# Altium PCB IMX_PCB.PcbDoc (part 2 of 2)
Units mm, origin at the board's own origin, x right, y up, seen from the top; angles counter-clockwise.
Board outline 66 x 57 mm, 4 copper layers (L1 (Sensor), L2 (GND), L3 (PWR), L4 (Comp)), stack 1.586 mm thick; 125 components, 55 nets, 466 pads, 337 vias.
Unrouted connection lines stored in the file: 246.
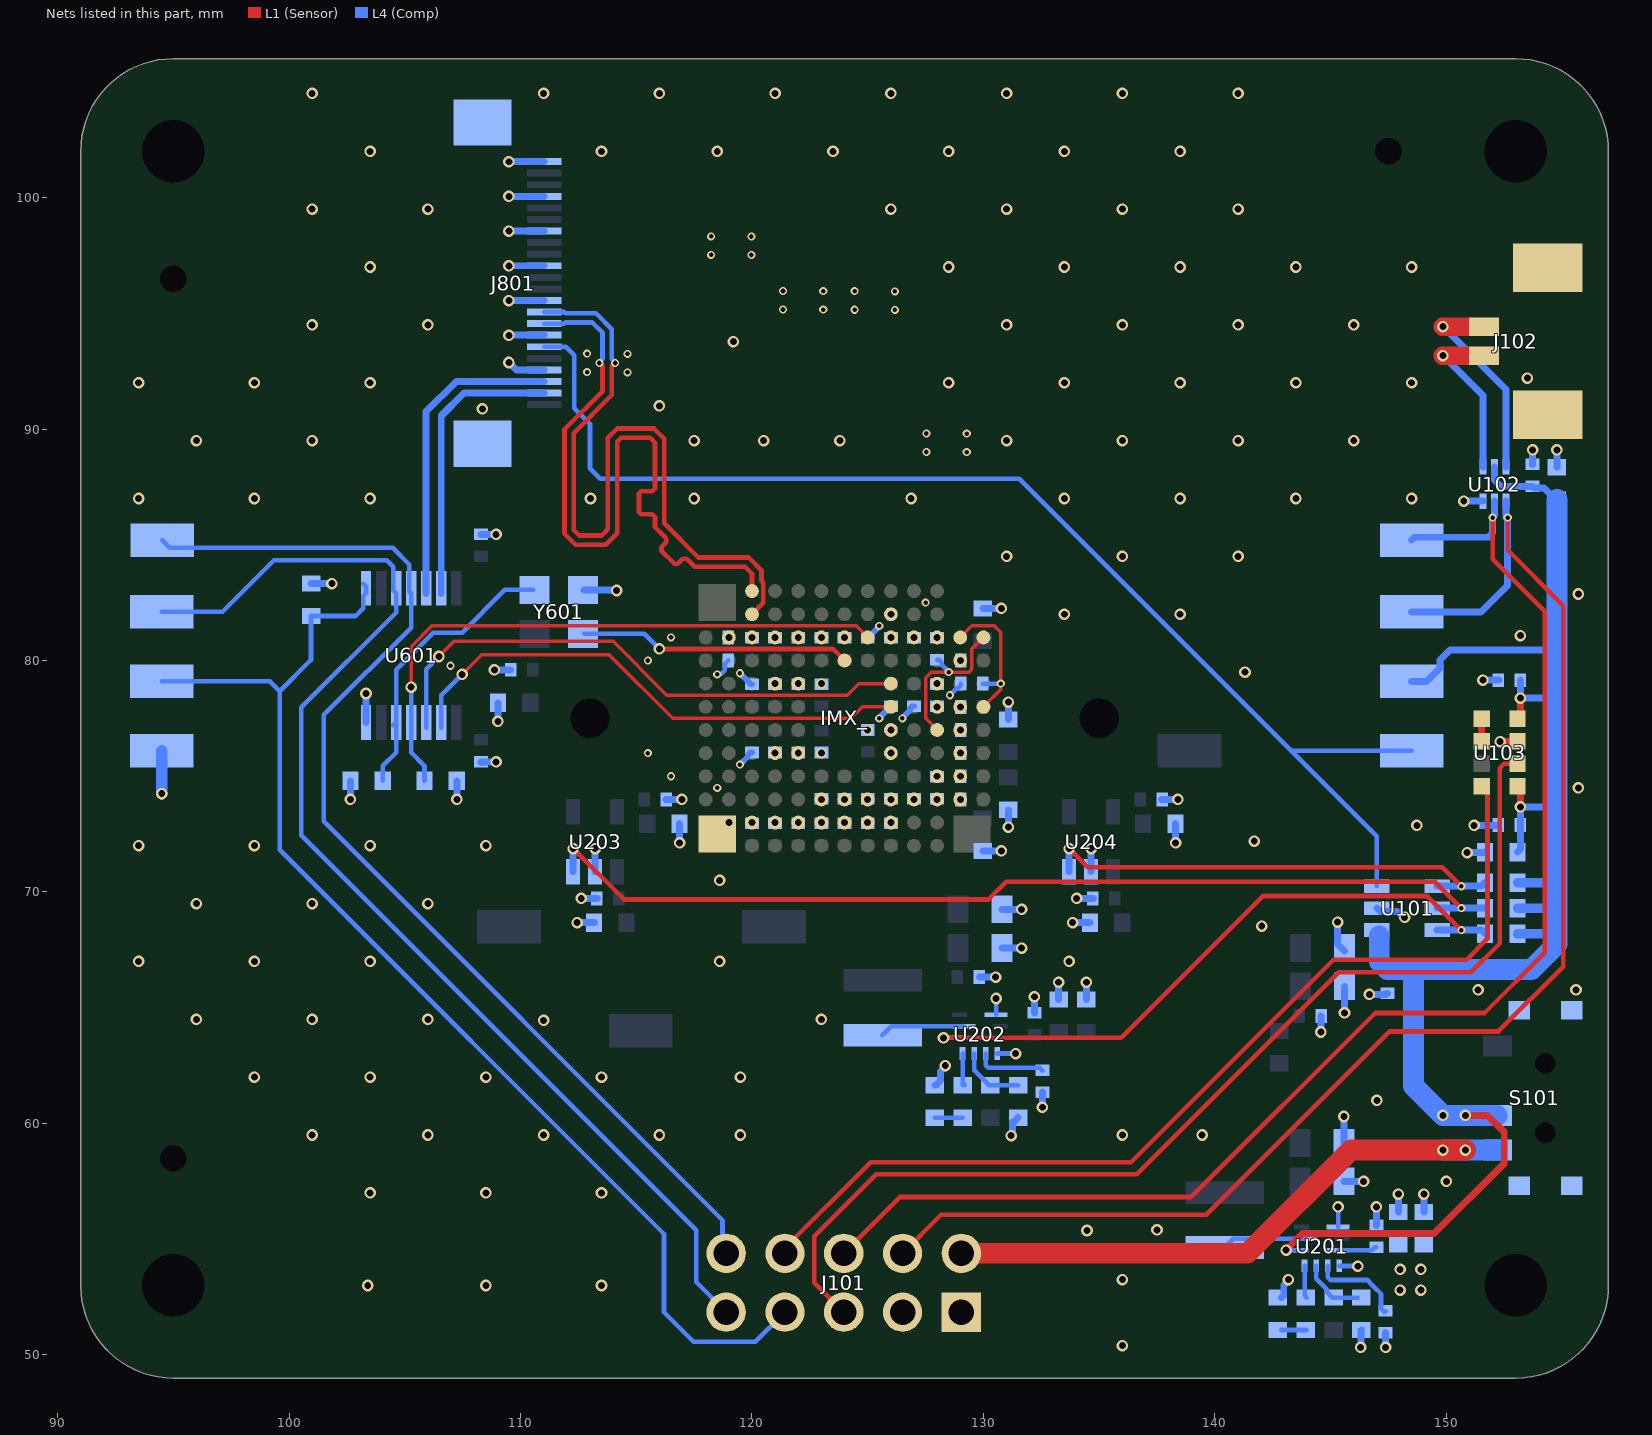
[diagram p4: the nets of this part, all layers, seen from the top]

## Via types
v1: diameter 0.5, hole 0.3, L1 (Sensor) to L4 (Comp), 221 vias
v2: diameter 0.45/0.45/0.45/0.45 (per signal layer), hole 0.3, L1 (Sensor) to L4 (Comp), 63 vias
v3: diameter 0.35, hole 0.2, L1 (Sensor) to L4 (Comp), 51 vias
v4: diameter 0.45, hole 0.3, L1 (Sensor) to L4 (Comp), 2 vias

## Nets (pads, with @x,y where several pads share a name; then routed paths per layer and width w, separated by ;. In a path a pad name is that pad's centre, name@x,y a point inside that pad or via, vN(x,y) a via of type N, cw(c..) or ccw(c..) an arc to the next point about the centre after c; other vN are vias at no path point) (continued)
CSI2_D3_N: IMX_.L2 J801.14 | length 32
  L1 (Sensor) w0.2: v3(114.09,92.853) 113.945,92.708 113.945,91.47 112.3,89.825 112.3,85.641 112.541,85.4 113.509,85.4 113.775,85.666 113.775,89.616 114.184,90.025 115.766,90.025 116.212,89.578 116.212,85.923 117.685,84.45 119.866,84.45 120.41,83.906 120.41,83.44 120.49,83.36 120.49,82.49 IMX_.L2@120,82
  L4 (Comp) w0.2: J801.14@111.027,95.056 111.877,95.056 111.927,95.005 113.26,95.005 113.945,94.32 113.945,93.039 114.085,92.9 v3@114.085,92.847
CSI2_D3_P: IMX_.L1 J801.15 | length 32
  L1 (Sensor) w0.2: v3(113.41,92.855) 113.545,92.72 113.545,91.636 111.9,89.991 111.9,85.475 112.375,85 113.675,85 114.175,85.5 114.175,89.45 114.35,89.625 115.6,89.625 115.812,89.413 115.812,87.8 115.812,87.434 115.695,87.317 115.218,87.317 115.118,87.217 115.118,86.417 115.218,86.317 115.695,86.317 115.812,86.2 115.812,86.1 115.812,85.757 116.208,85.361 116.3,85.269 116.3,85.103 116.089,84.892 116.089,84.75 116.655,84.184 116.796,84.184 117.008,84.396 117.173,84.396 117.244,84.325 117.519,84.05 119.7,84.05 120,83.75 IMX_.L1@120,83
  L4 (Comp) w0.2: J801.15@111.027,94.555 111.877,94.555 111.927,94.605 113.095,94.605 113.545,94.155 113.545,93.031 113.404,92.89 v3@113.404,92.849
CSI2_SCL: J801.20 U601.12 | length 13.5
  L4 (Comp) w0.3: U601.12@105.925,82.9 105.925,86.6 105.925,90.75 107.231,92.056 J801.20@111.027,92.056
CSI2_SDA: J801.21 U601.13 | length 12.5
  L4 (Comp) w0.3: U601.13@106.575,82.9 106.575,86.737 106.575,90.575 107.555,91.555 J801.21@111.027,91.555
FLAG1: R101.1 U101.6 U202.1 | length 28.3
  L1 (Sensor) w0.2: v1@128.325,63.7 135.95,63.7 142.075,69.825 149.175,69.825 v3(150.65,68.35)
  L4 (Comp) w0.2: v1(128.275,63.7) U202.1@128.975,63.7
  L4 (Comp) w0.3: U101.6@149.6,68.35 v3(150.65,68.35) 151.525,68.35 R101.1@151.675,68.2
FLAG2: R102.1 U101.5 U203.3 | length 43.2
  L1 (Sensor) w0.2: v1(112.275,71.875) 114.475,69.675 130.217,69.675 130.992,70.45 149.5,70.45 v3(150.65,69.3)
  L4 (Comp) w0.3: U203.3@112.275,70.875 v1(112.275,71.875) v1@112.275,71.95 ; U101.5@149.6,69.3 v3(150.65,69.3) R102.1@151.675,69.3
FLAG3: R103.1 U101.4 U204.3 | length 20.8
  L1 (Sensor) w0.2: v1(133.7,71.875) 134.5,71.075 149.825,71.075 v3(150.65,70.25)
  L4 (Comp) w0.3: U204.3@133.7,70.875 v1(133.7,71.875) v1@133.7,71.95 ; U101.4@149.6,70.25 v3(150.65,70.25) 150.659,70.26 151.509,70.26 R103.1@151.65,70.4
GND: C101.2 C102.2 C103.2 C104.2 C105.2 C106.2 C201.2 C202.2 C203.2 C204.2 C205.2 C206.2 C207.2 C208.2 C209.2 C210.2 C211.2 C212.2 C213.2 C214.2 C215.2 C216.2 C217.2 C218.2 C219.2 C220.2 C221.2 C222.2 C223.2 C224.2 C301.2 C302.2 C303.1 C304.1 C305.2 C306.2 C307.1 C308.1 C309.2 C310.2 C311.2 C312.2 C313.1 C314.1 C315.2 C316.2 C317.1 C318.1 C319.2 C320.2 C321.1 C322.1 C323.2 C324.2 C325.1 C326.1 C401.1 C402.1 C403.2 C404.2 C405.1 C406.1 C407.2 C408.2 C501.2 C502.2 C503.2 C504.2 C505.1 C506.1 C507.2 C508.2 C509.2 C510.2 C601.1 C602.2 C603.2 C604.2 C701.1 C702.1 C703.1 C704.2 IMX_.B4 IMX_.B6 IMX_.B7 IMX_.B8 IMX_.B9 IMX_.B10 IMX_.C3 IMX_.C6 IMX_.C10 IMX_.D3 IMX_.D10 IMX_.E2 IMX_.E3 IMX_.E7 IMX_.E8 IMX_.E10 IMX_.E11 IMX_.F10 IMX_.F11 IMX_.G3 IMX_.G10 IMX_.G11 IMX_.H3 IMX_.H10 IMX_.H11 IMX_.J3 IMX_.J5 IMX_.J8 IMX_.J11 IMX_.K3 IMX_.K5 IMX_.K8 IMX_.K11 IMX_.L3 IMX_.L11 IMX_.M3 IMX_.N12 J101.3 J102.3 J102.4 J801.1 J801.4 J801.7 J801.10 J801.13 J801.16 J801.19 J801.23 J801.24 R202.1 R204.1 R206.1 R208.1 R601.1 R602.1 R603.1 S101.MP1 S101.MP2 S101.MP3 S101.MP4 TP7.1 U101.2 U102.3 U103.3 U201.4 U201.7 U202.4 U202.7 U203.2 U204.2 U601.7 Y601.2 | length 64.8
  L1 (Sensor) w0.3: v1(152.325,76.5) 152.33,76.505 153.07,76.505 U103.3@153.075,76.51
  L4 (Comp) w0.2: v3(118.5,79.4) 118.529,79.429 118.673,79.429 118.825,79.581 118.825,79.85 C301.2@118.975,80 ; v3(128.55,78.5) 128.85,78.8 128.9,78.8 129.025,78.925 C701.1@129.025,79 ; U202.4@130.55,64.7 v1(130.55,65.4) ; U202.7@130.6,63.025 v1@131.381,63.025 ; U201.4@145.325,55.525 v1@145.325,56.325 ; U201.7@145.375,53.85 145.384,53.841 146.166,53.841 v1(146.175,53.831)
  L4 (Comp) w0.25: v3(119.475,75.5) 119.825,75.85 119.825,75.925 119.925,76.025 C408.2@120,76.025 ; v3(119.475,79.45) 119.825,79.1 119.95,78.975 C404.2@120,78.975 ; C319.2@125,80.975 125.075,80.975 125.175,81.075 125.175,81.15 125.5,81.475 v3(125.5,81.5) ; v3(125.5,77.5) 125.5,77.525 125.825,77.85 125.825,77.925 125.925,78.025 C318.1@126,78.025 ; v3(126.5,77.5) 126.5,77.525 126.825,77.85 126.825,77.925 126.925,78.025 C316.2@127,78.025 ; C703.1@127.825,73.95 127.925,74.05 C703.1@128,74.05
  L4 (Comp) w0.3: R601.1@100.95,83.325 v1(101.85,83.325) ; v1(102.65,74) R603.1@102.65,74.8 ; v1@103.3,78.575 103.325,78.55 U601.7@103.325,77.325 ; v1(107.25,74) R602.1@107.25,74.8 ; C602.2@108.3,75.6 C602.2@108.337,75.6 ; C602.2@108.3,75.625 v1(108.95,75.625) ; C601.1@108.3,85.45 v1(108.95,85.45) ; v1(108.875,79.6) C604.2@109.575,79.6 ; v1(109.025,77.375) C603.2@109.025,78.175 ; v1(109.5,92.875) 109.82,92.555 J801.19@111.027,92.555 ; v1(109.5,94.05) 109.506,94.056 J801.16@111.027,94.056 ; v1@109.506,95.555 J801.13@111.027,95.555 ; v1@109.506,97.056 J801.10@111.027,97.056 ; v1@109.506,98.555 J801.7@111.027,98.555 ; v1@109.506,100.056 J801.4@111.027,100.056 ; v1@109.506,101.555 J801.1@111.027,101.555 ; v1@112.5,68.675 C217.2@113.2,68.675 ; v1(112.625,69.725) C218.2@113.325,69.725 ; Y601.2@112.75,83.05 114.125,83.05 v1(114.15,83.025) ; U203.2@113.225,70.875 v1(113.225,71.875) ; C220.2@116.275,74 v1(116.975,74) ; v1(116.875,72.125) C219.2@116.875,72.95 ; R206.1@127.9,61.65 127.95,61.65 128.15,61.85 128.15,62.246 128.35,62.446 v1(128.35,62.5) ; C216.2@129.825,66.325 v1(130.525,66.325) ; C507.2@129.975,71.775 v1(130.775,71.775) ; C510.2@129.975,82.25 v1(130.775,82.25) ; C214.2@130.8,67.575 v1(131.65,67.575) ; C215.2@130.8,69.25 v1(131.65,69.25) ; v1@131.075,72.85 C505.1@131.075,73.55 ; C503.2@131.075,77.45 v1@131.075,78.15 ; v1(131.2,59.475) 131.2,59.529 131.25,59.579 131.25,60.05 131.263,60.063 131.313,60.063 R208.1@131.5,60.25 ; C212.2@132.2,64.775 v1(132.2,65.475) ; v1(132.55,60.7) C213.2@132.55,61.35 ; C211.2@133.25,65.35 v1@133.25,66.05 ; v1@133.9,68.675 C221.2@134.6,68.675 ; v1(134.025,69.725) C222.2@134.75,69.725 ; C210.2@134.45,65.35 v1@134.45,66.05 ; U204.2@134.65,70.875 v1(134.65,71.875) ; C224.2@137.7,74 v1(138.4,74) ; v1(138.3,72.125) C223.2@138.3,72.95 ; R202.1@142.875,52.475 142.975,52.575 142.975,52.996 143.175,53.196 v1(143.175,53.25) ; v1(144.575,63.95) C209.2@144.575,64.65 ; C208.2@145.3,67.75 C208.2@145.6,67.45 ; C208.2@145.3,67.875 v1(145.3,68.7) ; C205.2@145.575,57.5 v1(146.425,57.5) ; C206.2@145.575,59.15 v1(145.575,60.3) ; v1(145.6,64.775) C207.2@145.6,65.925 ; v1(146.3,50.325) 146.313,50.338 146.313,51.062 R204.1@146.325,51.075 ; v1(146.675,65.575) 147.4,65.575 C101.2@147.45,65.625 ; C203.2@146.975,55.6 v1(146.975,56.4) ; U101.2@147,69.3 147.15,69.15 147.896,69.15 148.146,68.9 v1(148.2,68.9) ; v1(147.375,50.325) C204.2@147.375,50.975 ; C202.2@147.925,56.175 v1(147.925,56.95) ; C201.2@149.025,56.175 v1(149.025,56.95) ; v1(150.75,86.885) U102.3@151.575,86.885 ; v1(150.9,71.7) 151.65,71.7 C104.2@151.675,71.725 ; v1(151.2,72.875) C105.2@152.225,72.875 ; v1(151.575,79.15) C106.2@152.275,79.15 ; C103.2@153.725,88.475 v1(153.725,89.1) ; C102.2@154.775,88.35 v1@154.776,89.05
  L4 (Comp) w0.45: v2(129,78) C501.2@129.025,78.025
  L4 (Comp) w0.5: v1(94.5,74.25) TP7.1@94.5,76.1
  other v1: 136,50.4 103.4,53 108.5,53 113.5,53 136,53.25 134.475,55.375 137.5,55.4 145.325,56.4 103.5,57 108.5,57 113.5,57 150,57.5 101,59.5 106,59.5 111,59.5 116,59.5 119.5,59.5 136,59.5 139.45,59.5 147,61 98.5,62 103.5,62 108.5,62 113.5,62 119.5,62 131.391,63.016 111,64.45 96,64.5 101,64.5 106,64.5 123,64.5 151.375,65.775 155.6,65.775 133.25,66.1 134.45,66.1 93.5,67 98.5,67 103.5,67 118.6,67 133.7,67 142.025,68.525 112.45,68.675 133.85,68.675 96,69.5 101,69.5 106,69.5 118.6,70.5 93.5,72 98.5,72 103.5,72 108.5,72 141.7,72.2 131.075,72.8 148.725,72.875 155.7,74.5 131.075,78.2 103.325,78.575 141.3,79.5 153.2,81.075 133.5,82 138.5,82 155.7,82.875 131,84.5 136,84.5 141,84.5 93.5,87 98.5,87 103.5,87 113.025,87 117.5,87 126.875,87 133.5,87 138.5,87 143.5,87 148.5,87 154.776,89.1 96,89.5 101,89.5 117.5,89.5 120.5,89.5 123.8,89.5 131,89.5 136,89.5 141,89.5 146,89.5 108.35,90.875 116,91 93.5,92 98.5,92 103.5,92 128.5,92 133.5,92 138.5,92 143.5,92 148.5,92 153.5,92.2 119.2,93.775 101,94.5 106,94.5 131,94.5 136,94.5 141,94.5 146,94.5 109.5,95.55 103.5,97 128.5,97 133.5,97 138.5,97 143.5,97 148.5,97 109.5,97.05 109.5,98.55 101,99.5 106,99.5 126,99.5 131,99.5 136,99.5 141,99.5 109.5,100.05 109.5,101.55 103.5,102 113.5,102 118.5,102 123.5,102 128.5,102 133.5,102 138.5,102 101,104.5 111,104.5 116,104.5 121,104.5 126,104.5 131,104.5 136,104.5 141,104.5
  other v2: 119,73 120,73 121,73 122,73 123,73 124,73 125,73 126,73 123,74 124,74 125,74 126,74 127,74 128,74 129,74 129,75 121,76 122,76 123,76 126,76 129,76 125,77 126,77 128,78 121,79 122,79 123,79 129,80 119,81 120,81 121,81 122,81 123,81 124,81 126,81 127,81 128,81 126,82
  other v3: 118.5,74.5 116.5,75 115.5,76 106.975,79.775 115.5,80 116.5,81 127.5,82.5 127.537,89.011 129.277,89.004 127.537,89.811 129.277,89.804 112.88,92.457 114.62,92.451 114.62,93.251 112.88,93.257 123.08,95.16 124.435,95.157 126.175,95.15 121.34,95.166 121.34,95.966 123.08,95.96 124.435,95.957 126.175,95.95 119.975,97.518 118.235,97.525 118.235,98.325 119.975,98.318
  other v4: 129,77
GPIO_CLK_EN: J101.9 TP3.1 U601.10 | length 52.6
  L4 (Comp) w0.2: TP3.1@94.5,82.1 97.125,82.1 99.35,84.325 104.225,84.325 104.5,84.05 104.5,83.025 104.625,82.9 104.625,82.075 100.525,77.975 100.525,72.45 117.585,55.39 117.585,53.15 J101.9@118.885,51.85
GPIO_HB+: J101.4 TP6.1 U102.1 | length 62.3
  L1 (Sensor) w0.2: J101.4@126.505,54.39 128.165,56.05 139.625,56.05 147.55,63.975 152.25,63.975 155.05,66.775 155.05,82.375 152.65,84.775 v3(152.65,86.175)
  L4 (Comp) w0.3: TP6.1@148.5,82.1 151.5,82.1 152.64,83.24 152.64,86.165 v3(152.65,86.175) ; v3@152.575,86.175 U102.1@152.575,86.885
GPIO_HB-: J101.6 TP5.1 U102.2 | length 60.4
  L1 (Sensor) w0.2: J101.6@123.965,54.39 126.4,56.825 138.975,56.825 146.923,64.773 151.648,64.773 154.25,67.375 154.25,82.125 152,84.375 v3(152,86.175)
  L4 (Comp) w0.3: TP5.1@148.5,85.2 148.625,85.325 151.824,85.325 152,85.501 152,86.189 152.075,86.264 U102.2@152.075,86.885
GPIO_LS_EN: J101.7 R601.2 TP12.1 U601.8 | length 52.6
  L4 (Comp) w0.2: TP12.1@94.5,79.1 99.175,79.1 99.6,78.675 ; U601.8@103.2,83.325 103.325,83.2 103.325,82.9 103.2,82.775 103.2,82.25 102.875,81.925 R601.2@100.95,81.925 100.95,80.025 99.6,78.675 ; J101.7@121.425,51.85 120.15,50.575 117.475,50.575 116.2,51.85 116.2,55.225 99.6,71.825 99.6,78.675
GPIO_XCLR: J101.10 TP4.1 U601.11 | length 49.7
  L4 (Comp) w0.2: TP4.1@94.525,85.2 94.85,84.875 104.475,84.875 105.2,84.15 105.2,82.975 105.275,82.9 105.275,81.425 101.5,77.65 101.5,73.05 118.727,55.823 118.727,54.548 J101.10@118.885,54.39
NetC204_1: C204.1 U201.8 | length 4
  L4 (Comp) w0.2: U201.8@144.875,53.85 144.875,53.356 144.992,53.239 146.579,53.239 146.803,53.015 146.915,52.904 147.177,52.641 147.177,52 147.302,51.875 C204.1@147.375,51.875
NetC213_1: C213.1 U202.8 | length 3.1
  L4 (Comp) w0.2: U202.8@130.1,63.025 130.1,62.517 130.217,62.4 132.425,62.4 C213.1@132.55,62.275
NetC701_2: C701.2 IMX_.A6 IMX_.B3 | length 6.4
  L1 (Sensor) w0.15: IMX_.B3@129,81 129.5,81.5 130.475,81.5 130.75,81.225 v3(130.75,79) 130.739,78.989 130.739,78.739 IMX_.A6@130,78
  L4 (Comp) w0.2: C701.2@129.975,79 v3(130.75,79)
NetC702_2: C702.2 IMX_.A3 IMX_.C7 | length 7
  L1 (Sensor) w0.15: IMX_.C7@128,77 127.5,77.5 127.5,79.25 127.75,79.5 v3(128.5,79.5) 129.375,79.5 129.5,79.625 129.5,80.5 IMX_.A3@130,81
  L4 (Comp) w0.2: C702.2@128,80.025 128.075,80.025 128.2,79.9 128.2,79.825 128.5,79.525 v3(128.5,79.5)
NetC703_2: C703.2 IMX_.C9
  other v2: 128,75
NetC704_1: C704.1 IMX_.C5
  other v2: 128,79
NetIMX__E5: IMX_.E5 U601.3 | length 24.3
  L1 (Sensor) w0.15: v1(106.475,80.175) 107.125,80.825 114,80.825 116.325,78.5 124.11,78.5 124.61,79 IMX_.E5@126,79
  L4 (Comp) w0.2: U601.3@105.925,77.1 105.925,79.625 v1(106.475,80.175)
NetIMX__E6: IMX_.E6 U601.2 | length 22.9
  L1 (Sensor) w0.15: v1(107.475,79.4) 108.325,80.25 113.825,80.25 116.575,77.5 124.275,77.5 124.775,78 IMX_.E6@126,78
  L4 (Comp) w0.2: U601.2@106.575,77.1 106.575,78.5 v1(107.475,79.4)
NetIMX__F3: IMX_.F3 R602.2 U601.4 | length 26.4
  L1 (Sensor) w0.15: v1(105.275,78.85) 105.275,80.6 106.175,81.5 124.5,81.5 IMX_.F3@125,81
  L4 (Comp) w0.2: v1@105.25,78.85 105.275,78.825 U601.4@105.275,77.325 105.275,76.025 105.85,75.45 R602.2@105.85,74.8
NetIMX__G4: IMX_.G4 Y601.3 | length 11.7
  L1 (Sensor) w0.2: v1(116,80.5) 123.5,80.5 IMX_.G4@124,80
  L4 (Comp) w0.2: Y601.3@112.75,81.15 115.35,81.15 v1(116,80.5)
NetJ102_1: J102.1 U102.4 | length 7.3
  L1 (Sensor) w0.8: v1(149.85,93.175) J102.1@151.625,93.175
  L4 (Comp) w0.3: v1(149.85,93.175) 151.575,91.45 U102.4@151.575,88.365
NetJ102_2: J102.2 U102.6 | length 9
  L1 (Sensor) w0.8: v1(149.85,94.425) J102.2@151.625,94.425
  L4 (Comp) w0.3: v1(149.85,94.425) 152.575,91.7 U102.6@152.575,88.365
NetL201_1: L201.1 U201.2 | length 3.7
  L4 (Comp) w0.2: L201.1@140.4,54.64 140.785,55.025 U201.2@143.925,55.025
NetL202_1: L202.1 U202.2 | length 3.7
  L4 (Comp) w0.2: L202.1@125.625,63.815 126.01,64.2 U202.2@129.15,64.2
NetR201_1: R201.1 R202.2 | length 1.1
  L4 (Comp) w0.2: R202.2@142.875,51.075 R201.1@143.975,51.075
NetR201_2: R201.2 U201.10 | length 1.4
  L4 (Comp) w0.2: U201.10@143.875,53.85 143.875,52.575 R201.2@143.975,52.475
NetR203_1: R203.1 R204.2 U201.9 | length 2.8
  L4 (Comp) w0.2: U201.9@144.375,53.85 144.375,53.289 144.825,52.839 144.825,52.725 145.075,52.475 R204.2@146.175,52.475
NetR205_1: R205.1 R206.2 | length 1.2
  L4 (Comp) w0.2: R206.2@127.9,60.25 R205.1@129.1,60.25
NetR205_2: R205.2 U202.10 | length 1.5
  L4 (Comp) w0.2: R205.2@129.1,61.65 U202.10@129.1,63.025 ; R205.2@129.1,61.75 R205.2@129.2,61.65
NetR207_1: R207.1 R208.2 U202.9 | length 2.8
  L4 (Comp) w0.2: U202.9@129.6,63.025 129.6,62.3 R207.1@130.25,61.65 ; R207.1@130.3,61.65 R208.2@131.5,61.65
NetR603_2: R603.2 U601.5 Y601.1 | length 12.6
  L4 (Comp) w0.2: R603.2@104.05,74.8 104.05,75.45 104.625,76.025 U601.5@104.625,77.325 ; U601.5@104.5,77.2 U601.5@104.625,77.325 ; Y601.1@110.55,83.05 109.326,83.05 107.476,81.2 106.225,81.2 104.625,79.6 U601.5@104.625,77.325
NetU103_5: U103.5 U103.6 | length 1
  L1 (Sensor) w0.3: U103.6@151.525,76.51 U103.5@151.525,77.48
Pi_3.3V: C101.1 C102.1 C103.1 C104.1 C105.1 C106.1 R101.2 R102.2 R103.2 S101.2 TP1.1 U101.1 U102.5 U103.1 U103.4 U201.1 | length 76.2
  L1 (Sensor) w0.3: v1(143.075,54.525) 143.793,55.243 149.468,55.243 152.5,58.275 152.5,59.625 151.775,60.35 v1(150.825,60.35) ; U103.1@153.075,74.57 153.2,74.445 v1(153.2,73.675) ; U103.4@153.075,77.48 153.2,77.605 v1(153.2,78.375)
  L4 (Comp) w0.2: v1(143.075,54.525) U201.1@143.75,54.525
  L4 (Comp) w0.3: TP1.1@148.5,79.1 149.15,79.1 149.725,79.675 149.725,80.025 150.15,80.45 154.775,80.45 ; U102.5@152.075,88.365 152.075,87.8 152.35,87.525 C103.1@153.725,87.525 153.8,87.45 154.225,87.45 154.725,86.95 C102.1@154.775,86.95 ; C104.1@153.075,71.725 153.2,71.85 C105.1@153.2,72.9 v1(153.2,73.675) 154.775,73.675 ; C106.1@153.2,79.15 v1(153.2,78.375) 154.775,78.375 ; 154.725,75.825 154.775,75.875
  L4 (Comp) w0.4: R101.2@153.075,68.2 154.775,68.2 ; R102.2@153.075,69.3 154.763,69.3 154.775,69.313 ; R103.2@153.075,70.4 154.75,70.4 154.775,70.425
  L4 (Comp) w0.9: U101.1@147.1,68.1 147.1,67 147.45,66.65 148.575,66.65 ; v1(149.85,60.35) 148.575,61.625 148.575,66.65 ; v1@150,60.344 v1@150.819,60.344 ; v1@150.83,60.344 S101.2@152.194,60.344 ; C102.1@154.775,86.95 154.775,80.45 154.775,78.375 154.775,75.875 154.775,73.675 154.775,70.425 154.775,69.313 154.775,68.2 154.775,67.75 153.675,66.65 148.575,66.65
Pi_5V: C201.1 C202.1 C203.1 J101.1 U201.6 | length 1.7
  L4 (Comp) w0.2: U201.6@145.325,54.525 146.775,54.525 146.9,54.65 C203.1@146.975,54.65
  other v1: 148,52.8 148.9,52.8 148,53.7 148.9,53.7
Pi_SCL: J101.5 U103.2 | length 47.1
  L1 (Sensor) w0.2: J101.5@123.965,51.85 122.693,53.122 122.693,55.118 125.375,57.8 136.625,57.8 145.35,66.525 151.05,66.525 152.3,67.775 152.3,75.35 152.49,75.54 U103.2@153.075,75.54
Pi_SDA: J101.8 U103.8 | length 42.9
  L1 (Sensor) w0.2: J101.8@121.425,54.39 121.425,54.625 125.125,58.325 136.375,58.325 145.125,67.075 150.875,67.075 151.775,67.975 151.775,74.32 U103.8@151.455,74.64
POWER_EN: J801.17 TP2.1 U101.3 | length 54.6
  L4 (Comp) w0.2: J801.17@111.027,93.555 111.033,93.561 111.957,93.561 112.325,93.193 112.325,90.9 113,90.225 113,88.3 113.45,87.85 131.55,87.85 143.3,76.1 ; U101.3@147,70.25 147,72.4 143.3,76.1 ; TP2.1@148.5,76.1 143.3,76.1
Switch_3.3V: J101.2 S101.1 | length 26
  L1 (Sensor) w0.9: J101.2@129.045,54.39 141.415,54.39 145.875,58.85 v1(149.85,58.85) v1(150.825,58.85)
  L4 (Comp) w0.9: v1(149.85,58.85) v1(150.825,58.85) S101.1@152.2,58.85
pads on no net: IMX_.A1 IMX_.A5 IMX_.A12 IMX_.B5 IMX_.C1 IMX_.C2 IMX_.C4 IMX_.C8 IMX_.C11 IMX_.C12 IMX_.D1 IMX_.D2 IMX_.D5 IMX_.D6 IMX_.D7 IMX_.D8 IMX_.D9 IMX_.D11 IMX_.D12 IMX_.E12 IMX_.F1 IMX_.F2 IMX_.G12 IMX_.H4 IMX_.H9 IMX_.J9 IMX_.J10 IMX_.J12 IMX_.K9 IMX_.K10 IMX_.L4 IMX_.L5 IMX_.L6 IMX_.L7 IMX_.L8 IMX_.L9 IMX_.L10 IMX_.M4 IMX_.M5 IMX_.M6 IMX_.M7 IMX_.M8 IMX_.M9 IMX_.M10 IMX_.N1 IMX_.N4 IMX_.N5 IMX_.N6 IMX_.N7 IMX_.N8 IMX_.N9 IMX_.N10 J801.18 S101.3 S101.MH1 S101.MH2 U103.7 U201.5 U202.5 U203.4 U204.4 U601.6 U601.9

## Polygon pours and split planes (outlines as drawn)
GND on L3 (PWR) "tga" (solid, remove dead copper, pour order 185): 153.449,49.993 ccw(c153.449,52.533) 155.989,52.533 155.989,102.453 ccw(c153.449,102.453) 153.449,104.993 94.529,104.993 ccw(c94.529,102.453) 91.989,102.453 91.989,52.533 ccw(c94.529,52.533) 94.529,49.993
1.2V_FILT on L3 (PWR) "1.2V_FILT_L03_P047" (solid, pour order 47): 118.25,73.225 118.25,71.875 118.875,71.25 123.625,71.25 124.6,70.275 124.6,67.325 123.95,66.675 123.95,65.7 127.35,65.7 127.675,66.025 128.65,66.025 128.65,64.6 129.3,64.6 129.3,66.8 129.4,66.9 129.4,70.575 127.425,72.55 127.425,80.325 127.25,80.5 118.7,80.5 118.375,80.825 118.375,81.3 118.275,81.4 117.775,81.4 117.675,81.3 117.675,79.7 117.775,79.6 118.125,79.6 118.25,79.725 119.65,79.725 119.775,79.6 123.25,79.6 124.025,78.825 124.025,76.075 123.25,75.3 120.325,75.3
3.3V_FILT on L3 (PWR) "L4 (Comp)-3.3V_FILT" (solid, pour order 86): 130.575,80.4 130.4,80.575 130.4,81.2 130.3,81.3 129.6,81.3 129.5,81.2 129.5,80.5 129.6,80.4 129.6,79.75 129.7,79.65 131.575,79.65 131.8,79.425 131.8,77.075 131.625,76.9 130.575,76.9 130.4,77.075 130.4,78.225 130.3,78.325 129.7,78.325 129.6,78.225 129.6,73.6 129.5,73.5 129.5,72.725 129.525,72.7 130.35,72.7 130.4,72.75 130.4,73.875 130.625,74.1 132.6,74.1 132.775,74.275 134.85,74.275 135.3,73.825 135.3,72.925 135.575,72.65 136.275,72.65 137.25,72.65 137.25,74.3 135.975,75.575 133.925,75.575 132.6,76.9 132.6,80.225 132.425,80.4
1.8V_FILT on L3 (PWR) "L4 (Comp)-1.8V_FILT" (solid, pour order 103): 117.05,75.65 116.975,75.575 116.275,75.575 116.075,75.775 116.075,76.475 116.15,76.55 117.911,78.325 123.325,78.325 123.325,76.702 118.101,76.702 117.05,75.65
GND on L1 (Sensor) "GND_L01_P183" (solid, remove dead copper, pour order 183): 153.452,50.001 ccw(c153.452,52.541) 155.992,52.541 155.992,102.461 ccw(c153.452,102.461) 153.452,105.001 94.532,105.001 ccw(c94.532,102.461) 91.992,102.461 91.992,52.541 ccw(c94.532,52.541) 94.532,50.001
Pi_5V on L1 (Sensor) "PI_5V_L01_P056" (solid, pour order 56): 149.475,53.925 149.3,54.1 147.8,54.1 146.4,52.7 128.2,52.7 128.2,51 147.925,51 149.475,52.55
GND on L4 (Comp) "GND_L04_P187" (solid, remove dead copper, pour order 187): 153.552,50.176 ccw(c153.552,52.716) 156.092,52.716 156.092,102.636 ccw(c153.552,102.636) 153.552,105.176 94.632,105.176 ccw(c94.632,102.636) 92.092,102.636 92.092,52.716 ccw(c94.632,52.716) 94.632,50.176
1.8V_FILT on L4 (Comp) "L4 (Comp)-1.8V_FILT" (solid, pour order 88): 107.6,76.825 107.325,77.1 107,77.1 107,76.325 109.625,76.325 109.9,76.05 109.9,75.05 109.9,73.05 110.05,72.9 110.75,73.6 111.425,74.275 113.57,74.275 113.875,74.017 113.875,72.925 114.3,72.5 115.825,72.5 115.825,74.9 115.825,75.125 115.475,75.125 115,75.6 111.425,75.6 110.775,76.25 110.775,80.075 111.25,80.55 111.25,81.15 109.951,81.15 109.948,80.377 110.241,80.084 110.241,79.296 109.9,78.955 109.9,77.1 109.625,76.825
3.3V_FILT on L4 (Comp) "L4 (Comp)-3.3V_FILT" (solid, pour order 59): 135.725,72.5 135.3,72.925 135.3,73.825 134.85,74.275 132.775,74.275 132.6,74.1 131.902,74.1 131.725,74.275 131.725,76.725 131.901,76.9 132.6,76.9 133.925,75.575 135.975,75.575 137.25,74.3 137.25,72.5
Pi_5V on L4 (Comp) "PI_5V_L04_P057" (solid, pour order 57): 149.375,52.45 149.475,52.55 149.475,55.175 147.475,55.175 147.2,54.9 146.6,54.9 146.325,54.625 146.325,54.425 147.5,53.25 147.5,52.65 147.7,52.45
Pi_3.3V on L4 (Comp) "PI_3.3V_L04_P155" (solid, pour order 155): 154.175,87.25 154.325,87.1 154.325,86.55 155.225,86.55 155.225,87.575 155,87.8 153.475,87.8 153.35,87.675 153.35,87.375 153.475,87.25
Pi_3.3V on L4 (Comp) "PI_3.3V_L04_P150" (solid, pour order 150): 150.225,67.1 148.975,65.85 148.175,65.85 147.75,66.275 147.75,67.1
1.2V_FILT on L4 (Comp) "1.2V_FILT_L04_P087" (solid, pour order 87): 128.65,65.7 128.325,66.025 127.675,66.025 127.35,65.7 123.95,65.7 123.95,66.675 124.6,67.325 124.6,70.6 124.75,70.75 129.225,70.75 129.4,70.575 129.4,66.9 129.3,66.8 129.3,64.6 128.65,64.6
3.8V_VOUT on L4 (Comp) "3.8V_VOUT_L04_P036" (solid, pour order 36): 144.125,62.8 143.95,62.975 141.6,62.975 141.425,62.8 141.425,60.2 138.725,57.5 138.725,56.525 142.125,56.525 142.5,56.9 143.05,56.9 143.425,56.525 143.425,55.425 144.125,55.425
3.8V_FILT on L4 (Comp) "L4 (Comp)-3.8V_FILT" (solid, pour order 55): 118.175,64.425 117.75,64.425 117.6,64.575 117.6,64.8 113.875,68.525 113.875,70.875 114.475,70.875 114.475,70.525 126.45,58.55 131.1,58.55 134.075,61.525 134.075,62.325 132.95,63.45 131.3,63.45 131.15,63.6 130.05,63.6 130.05,63.8 131.15,63.8 131.3,63.95 131.625,63.95 131.8,64.125 132.625,64.125 132.95,64.45 137,64.45 137.475,64.925 137.475,66.425 135.3,68.6 135.3,71.125 135.9,71.125 135.9,70.45 139.35,67 141.427,67 142.652,68.225 144.125,68.225 144.2,68.15 144.2,67 144.2,65.2 144.125,65.125 144.125,63.8 143.95,63.625 141.6,63.625 141.427,63.8 141.427,64.45 139.35,64.45 131.95,57.05 125.55,57.05
GND on L2 (GND) "GND_L02_P134" (solid, remove dead copper, pour order 134): 153.452,50.001 ccw(c153.452,52.541) 155.992,52.541 155.992,102.461 ccw(c153.452,102.461) 153.452,105.001 94.532,105.001 ccw(c94.532,102.461) 91.992,102.461 91.992,52.541 ccw(c94.532,52.541) 94.532,50.001

## Keep-outs
Keep-Out Layer:
  circle w0.2: c154.275,62.609 r0.775
  circle w0.2: c154.275,59.609 r0.775
  circle w0.2: c113,77.5 r1.6
  circle w0.2: c147.5,102 r0.9
  circle w0.2: c135,77.5 r1.6
  circle w0.2: c153,53 r3.05
  circle w0.2: c95,53 r3.05
  circle w0.2: c95,102 r3.05
  circle w0.2: c153,53 r3.05
  circle w0.2: c95,53 r3.05
  circle w0.2: c153,102 r3.05
  circle w0.2: c95,58.509 r0.9
  circle w0.2: c95,96.509 r0.9
  lines w0.2: 95,56.05 92.5,56.05 cw(c92.5,56.826) 91.724,56.826 91.724,98.174 cw(c92.5,98.174) 92.5,98.95 95,98.95 ; 98.05,53 98.05,50.5 ccw(c98.826,50.5) 98.826,49.724 149.174,49.724 ccw(c149.174,50.5) 149.95,50.5 149.95,53 ; 98.05,102 98.05,104.5 cw(c98.826,104.5) 98.826,105.276 149.174,105.276 cw(c149.174,104.5) 149.95,104.5 149.95,102 ; 153,56.05 155.5,56.05 ccw(c155.5,56.826) 156.276,56.826 156.276,98.174 ccw(c155.5,98.174) 155.5,98.95 153,98.95

## Other copper
L1 (Sensor):
  pour cut-out: 117.5,71.5 130.525,71.5 130.525,83.625 117.5,83.625
  pour cut-out: 128.525,58.325 127.925,57.112 136.387,57.112 137.6,58.325
  pour cut-out: 125.125,58.325 121.425,54.39 126.505,54.39 128.533,58.325
L4 (Comp):
  pour cut-out: 152.825,87 154.15,87 154.15,87.225 152.825,87.225
  pour cut-out: 149.4,58.425 153.025,58.425 153.025,60.325 149.4,60.325
  pour cut-out: 119.5,76.55 123.5,76.55 123.5,78.45 119.5,78.45

## Silkscreen, mask and mechanical layers (free items; w line width, h text height)
Top Overlay:
  lines w0.3: 130.775,83.15 130.975,83.15 ; 131,50.6 131.2,50.6 ; 149.775,92.35 149.975,92.35 ; 153.8,74.075 153.8,74.275
Bottom Overlay:
  lines w0.2: 142.675,53.95 142.95,53.95 ; 142.825,53.95 143.25,53.95
  lines w0.3: 102.5,78.125 102.5,84.6 ; 102.7,54.5 103.3,54.5 ; 102.8,51.7 103.4,51.7 ; 106.4,51.7 107,51.7 ; 106.4,54.5 107,54.5 ; 107.95,67.35 107.95,65.275 107.75,65.075 ; 108,77.225 108.2,77.225 ; 109.5,83.375 109.5,83.575 ; 110,51.7 110.6,51.7 ; 110,54.5 110.6,54.5 ; 110,84 113.225,84 113.838,84.613 ; 110.925,71.3 111.425,71.8 111.425,72.65 ; 111.05,65.275 111.05,67.4 ; 111.625,90.55 111.825,90.55 ; 113.6,51.7 114.2,51.7 ; 113.6,54.5 114.2,54.5 ; 113.65,65.1 113.65,67.225 113.45,67.425 ; 114.95,70.875 115.15,70.875 ; 116.75,65.15 116.75,67.225 ; 117.05,55.075 117.05,55.104 ; 117.318,50.843 117.318,55.372 ; 117.585,55.51 117.585,55.64 ; 119.4,67.35 119.4,65.275 119.2,65.075 ; 122.5,65.275 122.5,67.4 ; 123.975,62.8 126.825,62.8 ; 126.675,61.925 127.849,63.099 128.55,63.099 ; 136.3,70.7 136.5,70.7 ; 136.336,71.893 136.336,72.118 ; 136.338,71.887 136.9,71.325 ; 137.35,77.2 137.35,79.325 137.15,79.525 ; 138.75,53.625 141.6,53.625 ; 140.45,77.25 140.45,79.325 ; 141.9,52.725 141.95,52.775 141.95,53.175 142.675,53.9 ; 145.9,68.55 146.025,68.55 ; 146.675,71.625 147.325,70.975 148.9,70.975 ; 150.575,88.525 150.975,88.125 150.975,87.475 ; 151.175,57.975 151.375,57.975 ; 153.2,86.5 153.2,86.7 ; 107.75,65.075 111.25,65.075 111.25,67.425 107.75,67.425 107.75,65.075 ; 113.45,67.425 116.95,67.425 116.95,65.075 113.45,65.075 113.45,67.425 ; 117.05,55.104 117.05,51.275 117.05,51.11 117.585,50.575 ; 117.05,55.104 117.585,55.64 ; 117.585,50.575 130.325,50.575 130.325,55.64 117.585,55.64 ; 117.585,50.575 117.585,55.64 ; 119.2,65.075 122.7,65.075 122.7,67.425 119.2,67.425 119.2,65.075 ; 137.15,79.525 140.65,79.525 140.65,77.175 137.15,77.175 137.15,79.525 ; 96.25,75.025 99.275,75.025 99.275,77.175 96.25,77.175 96.25,75.025 ; 96.25,78.025 99.275,78.025 99.275,80.175 96.25,80.175 96.25,78.025 ; 96.25,81.025 99.275,81.025 99.275,83.175 96.25,83.175 96.25,81.025 ; 96.275,84.125 99.3,84.125 99.3,86.275 96.275,86.275 96.275,84.125 ; 143.725,75.025 146.75,75.025 146.75,77.175 143.725,77.175 143.725,75.025 ; 143.725,78.025 146.75,78.025 146.75,80.175 143.725,80.175 143.725,78.025 ; 143.725,81.025 146.75,81.025 146.75,83.175 143.725,83.175 143.725,81.025 ; 143.725,84.125 146.75,84.125 146.75,86.275 143.725,86.275 143.725,84.125
  text "U102" at 150.725,88.384 h1.5
  text "U601" at 105.375,84.484 h1.5
  text "Y601" at 116.8,84.484 h1.5
  text "CLR" at 99.383,84.1 h1.5
  text "HB-" at 146.836,84.1 h1.5
  text "CLK" at 99.358,81 h1.5
  text "HB+" at 146.836,81 h1.5
  text "LS" at 99.358,78 h1.5
  text "3.3V" at 146.836,78 h1.5
  text "3.3V FILT" at 140.411,77.127 h1.5
  text "GND" at 99.358,75 h1.5
  text "SEQ" at 146.836,75 h1.5
  text "U101" at 146.8,71.484 h1.5
  text "U203" at 111.05,69.984 h1.5
  text "U204" at 140.035,69.984 h1.5
  text "1.8V FILT" at 111.011,65.027 h1.5
  text "3.8V FILT" at 116.711,65.027 h1.5
  text "1.2V FILT" at 122.461,65.027 h1.5
  text "MDK" at 97.25,62.133 h1.52
  text "U202" at 126.775,60.559 h1.5
  text "KRD" at 97.25,59.593 h1.52
  text "CLR" at 102.897,53.784 h1.5
  text "SDA" at 106.497,53.784 h1.5
  text "HB-" at 110.097,53.784 h1.5
  text "HB+" at 113.697,53.784 h1.5
  text "3.3V" at 117.111,53.784 h1.5
  text "U201" at 142.1,51.434 h1.5
  text "CLK" at 102.897,50.984 h1.5
  text "LS" at 106.497,50.984 h1.5
  text "SCL" at 110.097,50.984 h1.5
  text "GND" at 113.697,50.984 h1.5
  text "5V" at 117.1,50.984 h1.5
Mechanical 15:
  lines w0.05: 146.125,63.425 150.825,63.425 150.825,65.725 146.125,65.725 146.125,63.425 ; 146.15,60.225 150.85,60.225 150.85,62.525 146.15,62.525 146.15,60.225 ; 146.25,66.375 150.95,66.375 150.95,68.675 146.25,68.675 146.25,66.375
  lines w0.1: 147.975,64.575 148.975,64.575 ; 148,61.375 149,61.375 ; 148.1,67.525 149.1,67.525 ; 148.475,64.075 148.475,65.075 ; 148.5,60.875 148.5,61.875 ; 148.6,67.025 148.6,68.025